# Altium PCB MainPCB.PcbDoc
Units mil, origin at the board's own origin, x right, y up, seen from the top; angles counter-clockwise.
Board outline 2900 x 2000 mil, 4 copper layers (Top GND, Sig/3V3, Sig/5V, Bottom GND), stack 62.445 mil thick; 34 components, 15 nets, 244 pads, 75 vias.
Unrouted connection lines stored in the file: 1.
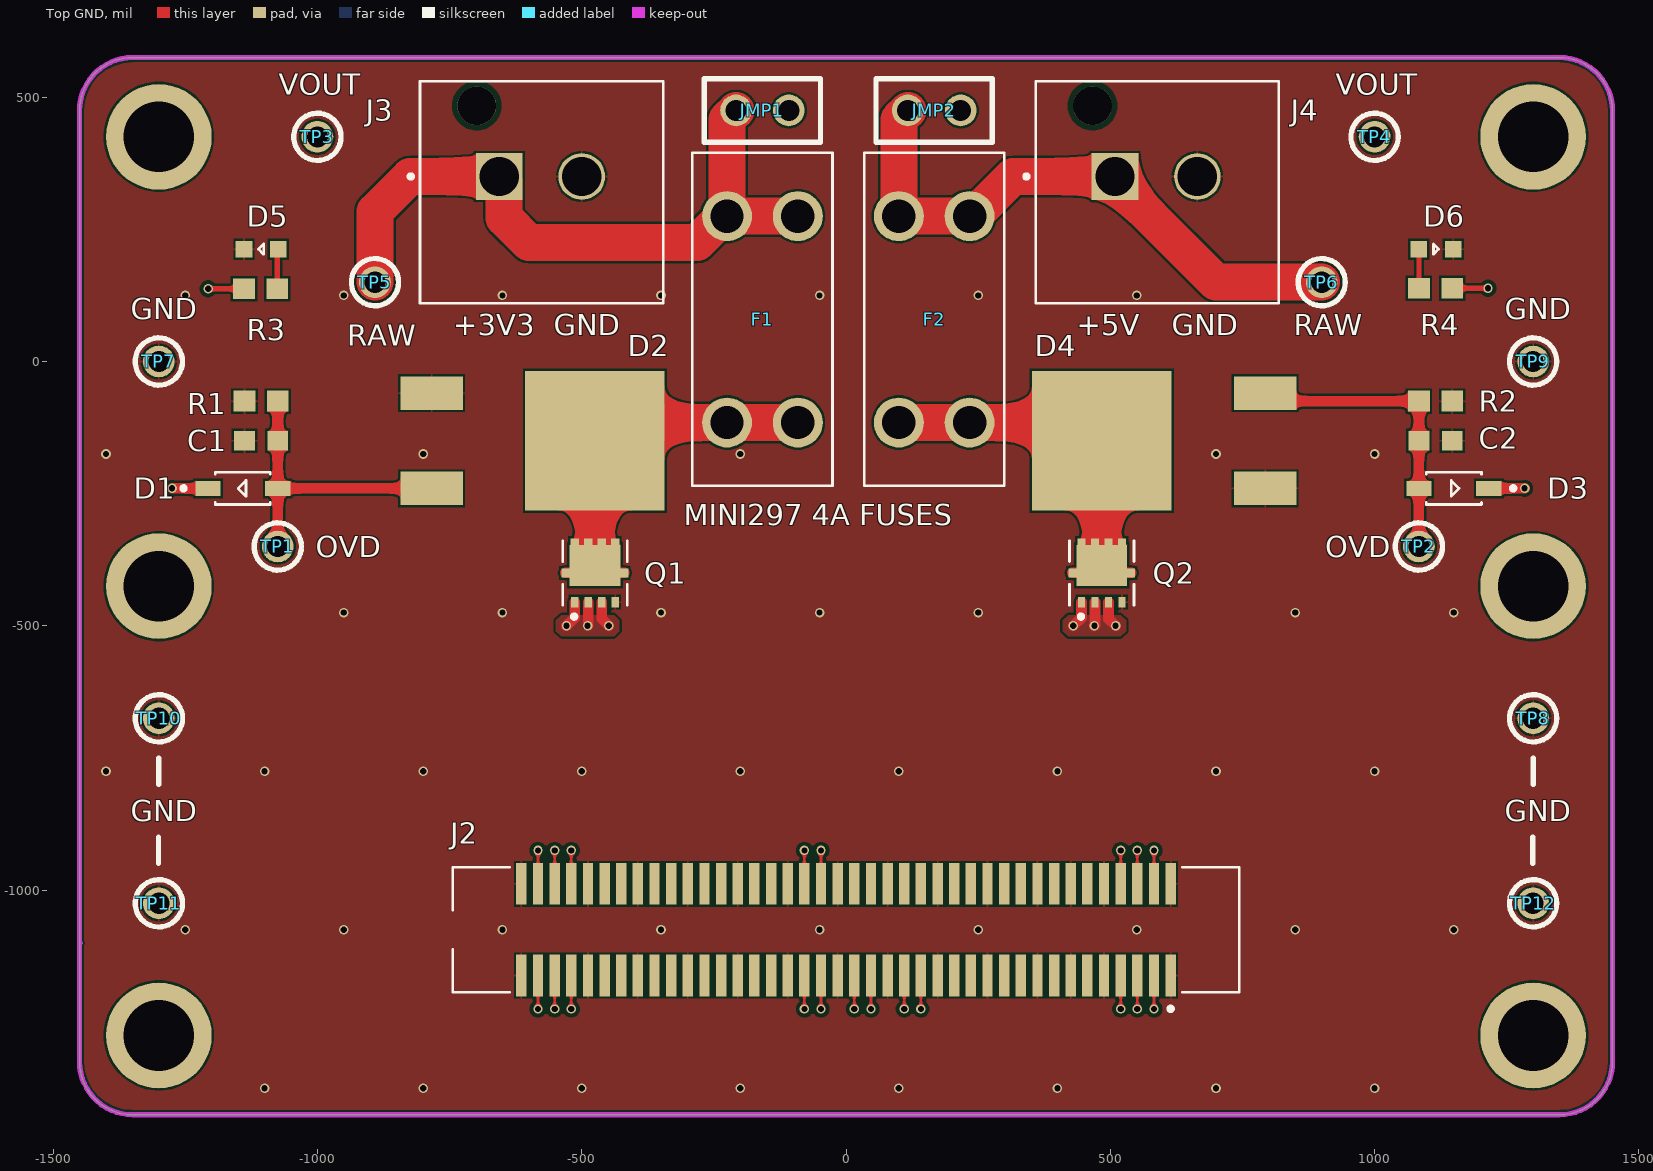
[diagram p0: Top GND view]
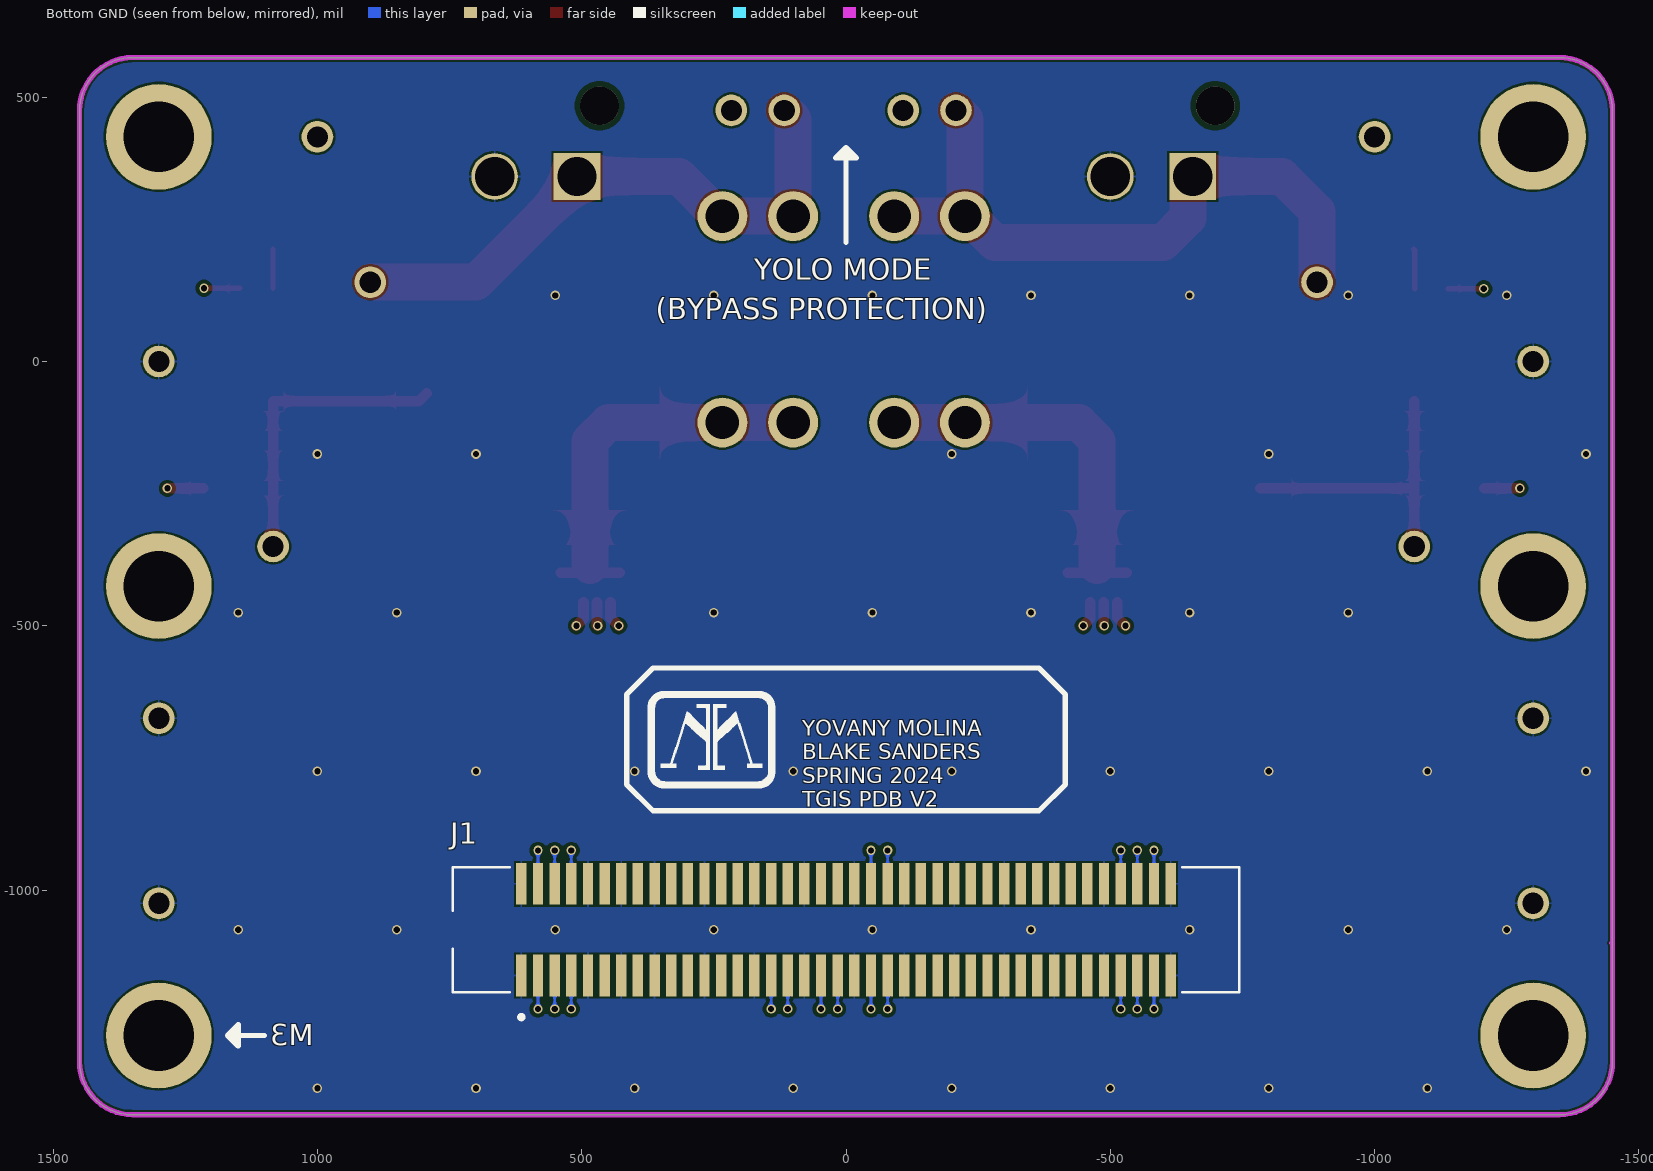
[diagram p1: Bottom GND view, seen from below]
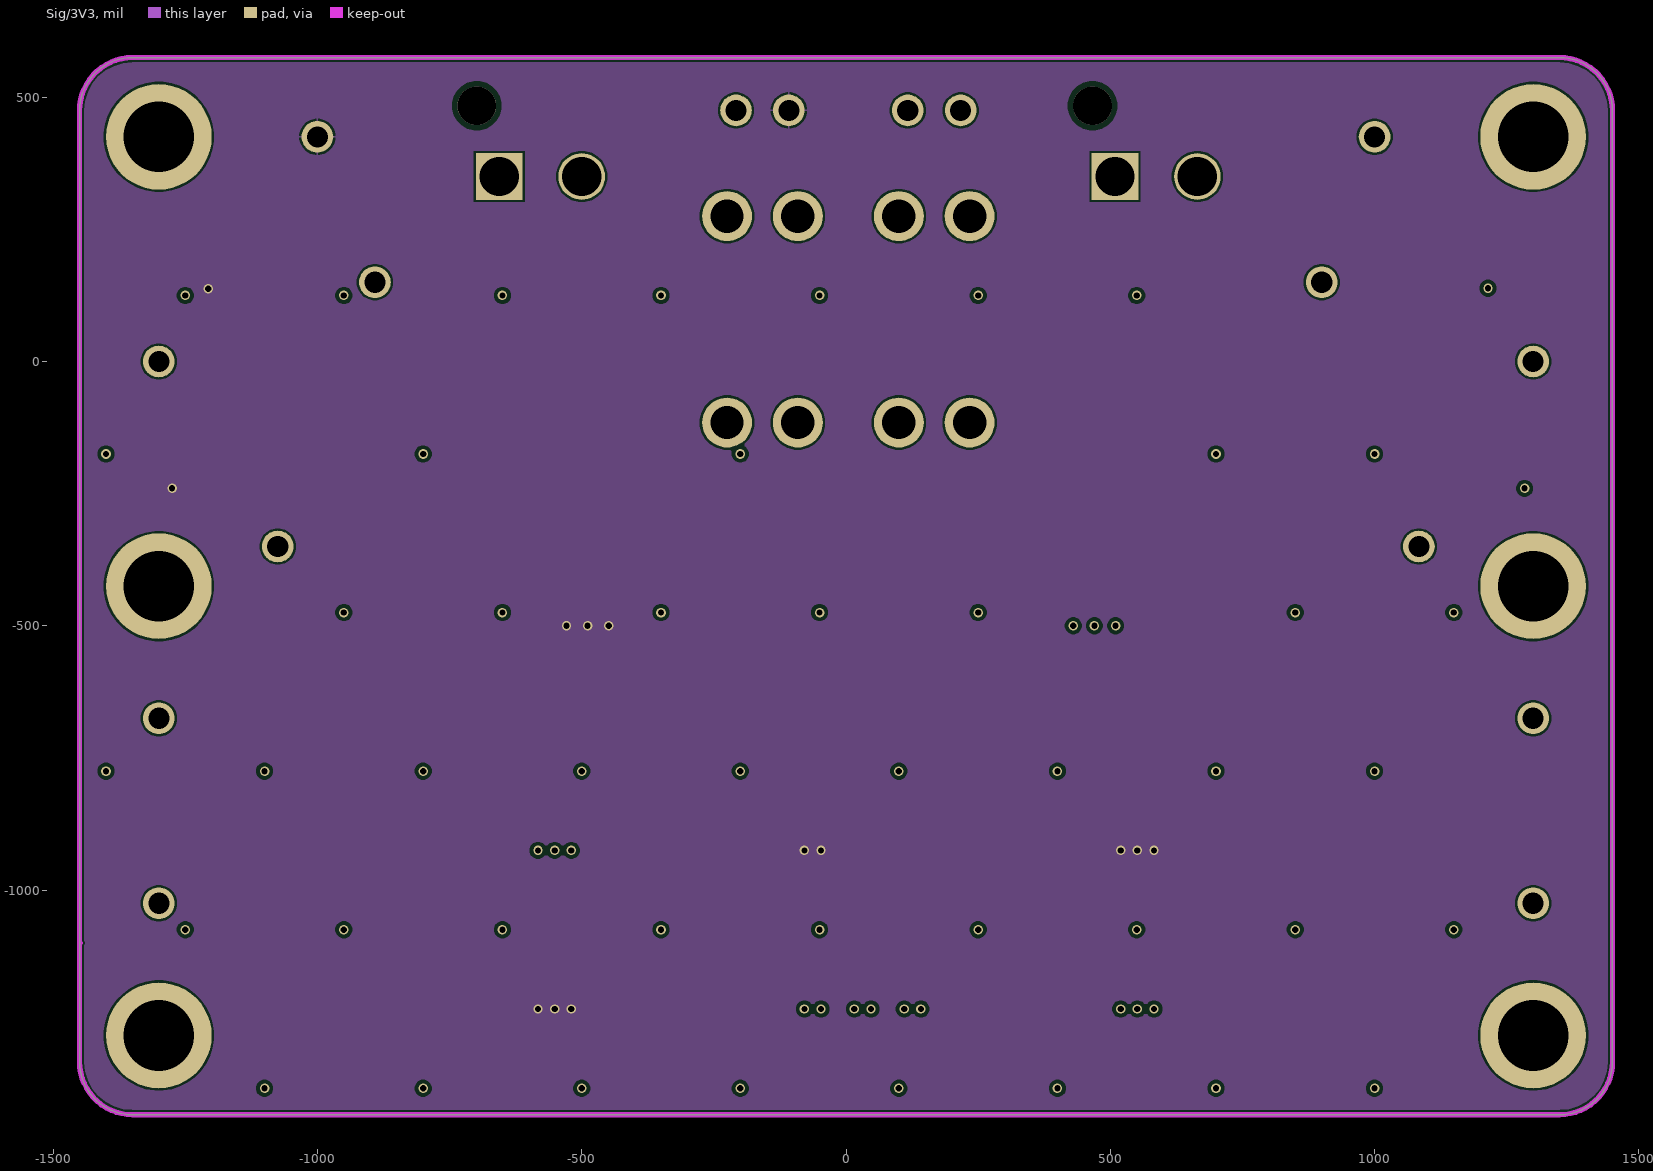
[diagram p2: Sig/3V3]
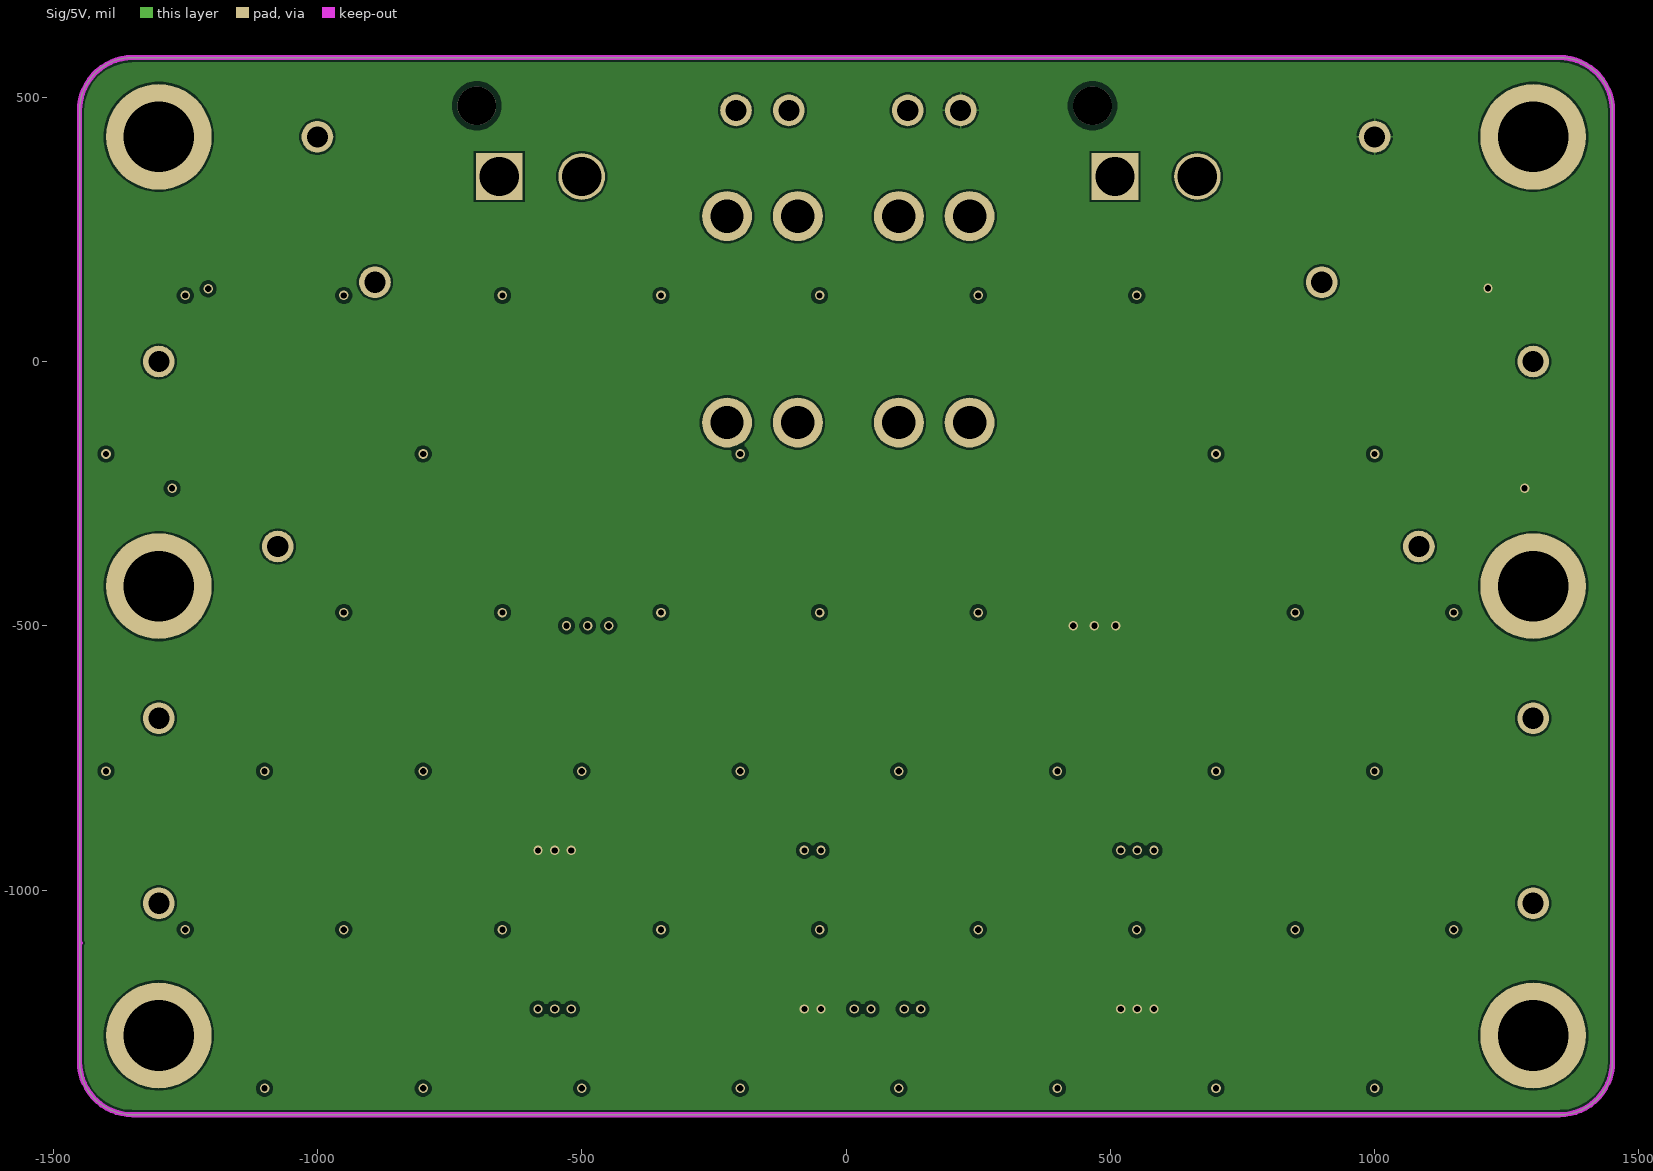
[diagram p3: Sig/5V]
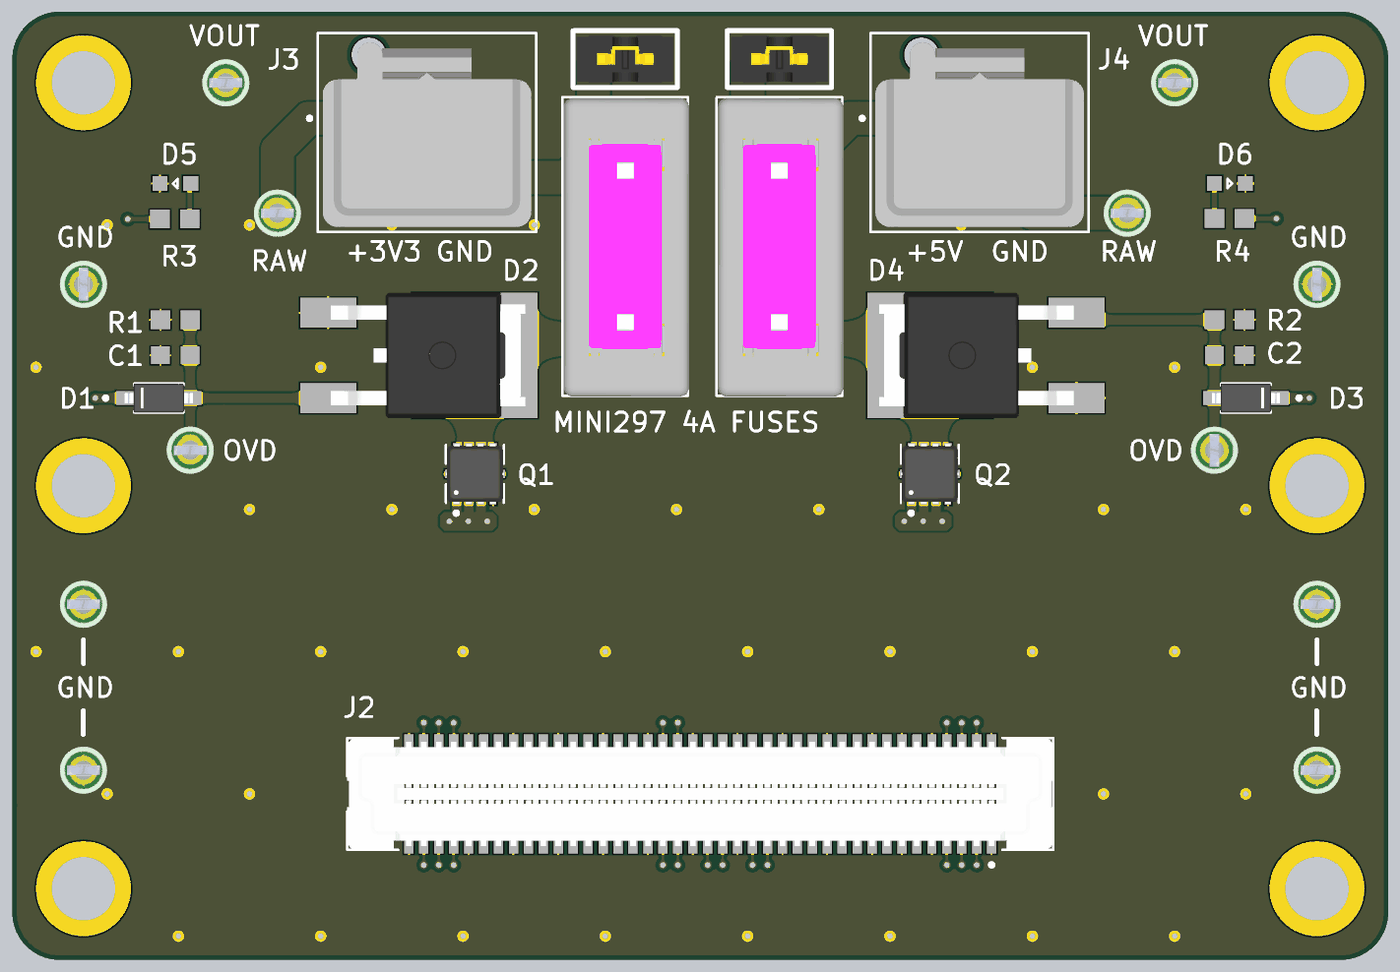
[diagram p4: 3D render of the assembled board from above, using the file's embedded part models]

## Layer stack, top to bottom
Top Mask: solder mask 0.591, Solder Resist, Dk 3.8
Top GND: signal copper 1.378
Dielectric 1: prepreg 8.28, 7628, Dk 4.6
Sig/3V3: signal copper 0.6
Core: core 41.929, FR-4, Dk 4.5
Sig/5V: signal copper 0.6
Dielectric 2: prepreg 8.28, 7628, Dk 4.6
Bottom GND: signal copper 1.378
Bottom Mask: solder mask 0.591, Solder Resist, Dk 3.8

## Board outline
-1450,-1325 -1450,475 cw(c-1350,475) -1350,575 1350,575 cw(c1350,475) 1450,475 1450,-1325 cw(c1350,-1325) 1350,-1425 -1350,-1425 cw(c-1350,-1325)

## Design rules (kind name [scope] priority, off if disabled: settings)
BoardOutlineClearance [All] p1: gap=7.87 ignorepadtopadclearanceinfootprint=FALSE
Clearance [All] p1: gap=4 ignorepadtopadclearanceinfootprint=FALSE except(5: Arc-Via Track-Via SMDPad-Via THPad-Via Via-Via Via-Fill Via-Poly Via-Region Via-Text; 9.84: Arc-Hole Track-Hole SMDPad-Hole THPad-Hole Via-Hole Fill-Hole Poly-Hole Region-Hole Text-Hole)
ComponentClearance [All] p1: gap=4 collisioncheckmode=3 verticalgap=4 showdistances=TRUE
DiffPairsRouting [All] p1: maxlimit=4 minlimit=4 mostfreqgap=4 toplayer_minwidth=4 toplayer_maxwidth=71497.94 toplayer_prefwidth=4 midlayer1_minwidth=4 midlayer1_maxwidth=71497.94 midlayer1_prefwidth=4 midlayer2_minwidth=4 midlayer2_maxwidth=71497.94 midlayer2_prefwidth=4 bottomlayer_minwidth=4 bottomlayer_maxwidth=71497.94 bottomlayer_prefwidth=4 maxuncoupledlength=500
Height [All] p1: minheight=0 maxheight=71497.94 prefheight=500
HoleSize [All] p1: absolutevalues=TRUE maxlimit=248.03 minlimit=7.87 maxpercent=80.000 minpercent=20.000
HoleToHoleClearance [All] p1: gap=9.84 allowstackedmicrovias=FALSE
MinimumAnnularRing [All] p1: minimumring=3
MinimumSolderMaskSliver [All] p1: minsoldermaskwidth=0
PlaneClearance [All] p1: clearance=4
PlaneConnect PlaneConnectPowerPads [InPadClass('PowerPads')] p1: planeconnectstyle=Direct reliefexpansion=20 reliefentries=4 reliefconductorwidth=10 reliefairgap=10
PlaneConnect [All] p2: pad.planeconnectstyle=Relief pad.reliefexpansion=11.81 pad.reliefentries=4 pad.reliefconductorwidth=4 pad.reliefairgap=4 via.planeconnectstyle=Direct via.reliefexpansion=11.81 via.reliefentries=4 via.reliefconductorwidth=5 via.reliefairgap=5
PolygonConnect PolygonConnectPowerPads [All vs (InPadClass('PowerPads'))] p1: connectstyle=Direct reliefconductorwidth=10 reliefentries=4 polygonreliefangle="90 Angle" airgapwidth=10
PolygonConnect [All] p2: thpad.connectstyle=Relief thpad.reliefconductorwidth=4 thpad.reliefentries=4 thpad.polygonreliefangle="90 Angle" thpad.airgapwidth=4 smdpad.connectstyle=Relief smdpad.reliefconductorwidth=4 smdpad.reliefentries=4 smdpad.polygonreliefangle="90 Angle" smdpad.airgapwidth=4 via.connectstyle=Direct via.reliefconductorwidth=5 via.reliefentries=4 via.polygonreliefangle="90 Angle" via.airgapwidth=5
RoutingVias [All] p1: holewidth=7.87 width=17.72 viastyle="Through Hole" minholewidth=7.87 minwidth=17.72 maxholewidth=248.03 maxwidth=257.87
SilkToSilkClearance [All] p1: silktosilkclearance=0
SilkToSolderMaskClearance [IsPad] p1: minsilkscreentomaskgap=4 clearancetoexposedcopper=TRUE
SolderMaskExpansion [All] p1: expansion=2.95 istentingtop=FALSE
Width [All] p1: maxlimit=71497.94 minlimit=4 preferedwidth=4
20 further rules are at their usual default settings.

## Classes and differential pairs
component class Power: C1 C2 D1 D2 D3 D4 D5 D6 F1 F2 J3 J4 JMP1 JMP2 Q1 Q2 R1 R2 R3 R4 TP1 TP2 TP3 TP4 TP5 TP6 TP7 TP8 TP9 TP10 TP11 TP12
component class Connectors: J1 J2

## Components (designator, comment, footprint, x,y, rotation, side; value= is the part's Value field where it differs from the comment)
C1 "100nF" CAPC0603 -1106.5,-150 r180 top
C2 "100nF" CAPC0603 1115.35,-150 r0 top
D1 "3V0" SOD3715X135N -1141.14,-240 r0 top
D2 "TN805" DPAK_TN -475,-150 r180 top
D3 "4V7" SOD3715X135N 1150,-240 r180 top
D4 "TN805" DPAK_TN 483.86,-150 r0 top
D5 "YELLOW" LED0603 -1106.5,212.5 r180 top
D6 "RED" LED0603 1116.34,212.5 r0 top
F1 "Fuse Holder" FUSE_3568 -158.07,79.72 r270 top
F2 "Fuse Holder" FUSE_3568 166.93,79.72 r270 top
J1 "10144517-081802LF" AMPHENOL_10144517-081802LF 0,-1075 r0 bottom
J2 "10144518-081802LF" AMPHENOL_10144518-081802LF 0,-1075 r180 top
J3 "1877285-2" TE_1877285-2 -655.91,350 r0 top
J4 "1877285-2" TE_1877285-2 508.86,350 r0 top
JMP1 "2PINJUMPER" 2PinJumper -208.07,475 r0 top
JMP2 "2PINJUMPER" 2PinJumper 116.93,475 r0 top
Q1 "AONR21321" TRANS_AONR21321 -475,-400 r90 top
Q2 "AONR21321" TRANS_AONR21321 483.86,-400 r90 top
R1 "3.3kR" RES0603 -1106.5,-75 r180 top
R2 "3.3kR" RES0603 1115.35,-75 r0 top
R3 "1kR" RES0603 -1107.48,137.5 r0 top
R4 "1kR" RES0603 1115.35,138.58 r180 top
TP1 "TP" TPTH-100mil -1075,-350 r90 top
TP2 "TP" TPTH-100mil 1083.86,-350 r0 top
TP3 "TP" TPTH-100mil -1000,425 r90 top
TP4 "TP" TPTH-100mil 1000,425 r90 top
TP5 "TP" TPTH-100mil -891.14,150 r90 top
TP6 "TP" TPTH-100mil 900,150 r90 top
TP7 "TP" TPTH-100mil -1300,0 r0 top
TP8 "TP" TPTH-100mil 1300,-675 r90 top
TP9 "TP" TPTH-100mil 1300,0 r0 top
TP10 "TP" TPTH-100mil -1300,-675 r90 top
TP11 "TP" TPTH-100mil -1300,-1025 r270 top
TP12 "TP" TPTH-100mil 1300,-1025 r90 top

## Footprints (in the part's own frame and the unit in brackets; to place one, negate y for a bottom-side part, rotate by r counter-clockwise, add the part's x,y. Pads: shape width x height; smd on the part's side, far side on the other; paste and mask are expansions set on the pad)
2PinJumper [mil]
  round 60 hole 40: 1(0,0) 2(100,0)
  silkscreen extent -60,-60 160,60, body extent -52,-50 152,50, height 339
AMPHENOL_10144517-081802LF [mm]
  rect 0.5x2 smd: 1(15.6,2.2) 2(15.6,-2.2) 3(14.8,2.2) 4(14.8,-2.2) 5(14,2.2) 6(14,-2.2) 7(13.2,2.2) 8(13.2,-2.2) 9(12.4,2.2) 10(12.4,-2.2) 11(11.6,2.2) 12(11.6,-2.2) 13(10.8,2.2) 14(10.8,-2.2) 15(10,2.2) 16(10,-2.2) 17(9.2,2.2) 18(9.2,-2.2) 19(8.4,2.2) 20(8.4,-2.2) 21(7.6,2.2) 22(7.6,-2.2) 23(6.8,2.2) 24(6.8,-2.2) 25(6,2.2) 26(6,-2.2) 27(5.2,2.2) 28(5.2,-2.2) 29(4.4,2.2) 30(4.4,-2.2) 31(3.6,2.2) 32(3.6,-2.2) 33(2.8,2.2) 34(2.8,-2.2) 35(2,2.2) 36(2,-2.2) 37(1.2,2.2) 38(1.2,-2.2) 39(0.4,2.2) 40(0.4,-2.2) 41(-0.4,2.2) 42(-0.4,-2.2) 43(-1.2,2.2) 44(-1.2,-2.2) 45(-2,2.2) 46(-2,-2.2) 47(-2.8,2.2) 48(-2.8,-2.2) 49(-3.6,2.2) 50(-3.6,-2.2) 51(-4.4,2.2) 52(-4.4,-2.2) 53(-5.2,2.2) 54(-5.2,-2.2) 55(-6,2.2) 56(-6,-2.2) 57(-6.8,2.2) 58(-6.8,-2.2) 59(-7.6,2.2) 60(-7.6,-2.2) 61(-8.4,2.2) 62(-8.4,-2.2) 63(-9.2,2.2) 64(-9.2,-2.2) 65(-10,2.2) 66(-10,-2.2) 67(-10.8,2.2) 68(-10.8,-2.2) 69(-11.6,2.2) 70(-11.6,-2.2) 71(-12.4,2.2) 72(-12.4,-2.2) 73(-13.2,2.2) 74(-13.2,-2.2) 75(-14,2.2) 76(-14,-2.2) 77(-14.8,2.2) 78(-14.8,-2.2) 79(-15.6,2.2) 80(-15.6,-2.2)
  silkscreen extent -18.9,-3 18.9,4.3, body extent -18.9,-3 18.9,3, height 3.66
AMPHENOL_10144518-081802LF [mm]
  rect 0.5x2 smd: 1(-15.6,2.2) 2(-15.6,-2.2) 3(-14.8,2.2) 4(-14.8,-2.2) 5(-14,2.2) 6(-14,-2.2) 7(-13.2,2.2) 8(-13.2,-2.2) 9(-12.4,2.2) 10(-12.4,-2.2) 11(-11.6,2.2) 12(-11.6,-2.2) 13(-10.8,2.2) 14(-10.8,-2.2) 15(-10,2.2) 16(-10,-2.2) 17(-9.2,2.2) 18(-9.2,-2.2) 19(-8.4,2.2) 20(-8.4,-2.2) 21(-7.6,2.2) 22(-7.6,-2.2) 23(-6.8,2.2) 24(-6.8,-2.2) 25(-6,2.2) 26(-6,-2.2) 27(-5.2,2.2) 28(-5.2,-2.2) 29(-4.4,2.2) 30(-4.4,-2.2) 31(-3.6,2.2) 32(-3.6,-2.2) 33(-2.8,2.2) 34(-2.8,-2.2) 35(-2,2.2) 36(-2,-2.2) 37(-1.2,2.2) 38(-1.2,-2.2) 39(-0.4,2.2) 40(-0.4,-2.2) 41(0.4,2.2) 42(0.4,-2.2) 43(1.2,2.2) 44(1.2,-2.2) 45(2,2.2) 46(2,-2.2) 47(2.8,2.2) 48(2.8,-2.2) 49(3.6,2.2) 50(3.6,-2.2) 51(4.4,2.2) 52(4.4,-2.2) 53(5.2,2.2) 54(5.2,-2.2) 55(6,2.2) 56(6,-2.2) 57(6.8,2.2) 58(6.8,-2.2) 59(7.6,2.2) 60(7.6,-2.2) 61(8.4,2.2) 62(8.4,-2.2) 63(9.2,2.2) 64(9.2,-2.2) 65(10,2.2) 66(10,-2.2) 67(10.8,2.2) 68(10.8,-2.2) 69(11.6,2.2) 70(11.6,-2.2) 71(12.4,2.2) 72(12.4,-2.2) 73(13.2,2.2) 74(13.2,-2.2) 75(14,2.2) 76(14,-2.2) 77(14.8,2.2) 78(14.8,-2.2) 79(15.6,2.2) 80(15.6,-2.2)
  silkscreen extent -18.9,-3 18.9,3.9, body extent -18.9,-3 18.9,3, height 4.71
CAPC0603 [mm] "Chip Capacitor, 2-Leads, Body 1.60x0.80mm, IPC Medium Density"
  rect 1x0.95 smd: 1(-0.8,0) 2(0.8,0)
  body extent -0.88,-0.48 0.87,0.48, height 0.8
DPAK_TN [mm]
  rect 6.7x6.7 smd: A(0,0)
  rect 3x1.6 smd: G(7.85,2.286) K(7.85,-2.286)
  body extent -2.71,-3.36 7.71,3.36, height 2.39
FUSE_3568 [mm]
  round 2.4 hole 1.6: 1(-4.96,1.7) 2(4.96,1.7) 3(-4.96,-1.7) 4(4.96,-1.7)
  silkscreen extent -8,-3.36 8,3.36, body extent -7.96,-3.3 8.04,3.43, height 16.21
LED0603 [mm] "Chip LED, 2-Leads, Body 1.60x0.80mm, IPC Medium Density"
  rect 0.8x0.8 smd: A(-0.825,0) C(0.825,0)
  silkscreen extent -0.12,-0.25 0.13,0.25, body extent -0.87,-0.48 0.88,0.47, height 0.8
RES0603 [mm] "Chip Resistor, 2-Leads, Body 1.60x0.80mm, IPC Medium Density"
  rect 1.05x1 smd: 1(-0.8,0) 2(0.8,0)
  body extent -0.88,-0.48 0.87,0.47, height 0.8
SOD3715X135N [mm]
  rect 1.21x0.73 smd: A(1.68,0) K(-1.68,0)
  silkscreen extent -2.95,-0.77 1.33,0.77, body extent -1.83,-0.77 1.83,0.77, height 1.36
TE_1877285-2 [mm]
  rect 2.24x2.24 hole 1.89: 1(0,0)
  round 2.24 hole 1.89: 2(3.96,0)
  round 1.86 hole 1.86 unplated: ""(-1.08,3.4)
  silkscreen extent -4.35,-6.1 7.87,4.57, body extent -3.55,-5.82 7.62,4.06, height 12.01
TPTH-100mil [mil] "Test Point"
  round 60 hole 40: 1(0,0)
  silkscreen extent -45,-45 45,45, body extent -50,-50 50,50, height 182
TRANS_AONR21321 [mm]
  rect 0.5x0.35 smd: 1(-1.4,0.975) 2(-1.4,0.325) 3(-1.4,-0.325) 4(-1.4,-0.975)
  rect 0.3x0.4 smd: 5(1.5,-0.975) 6(1.5,-0.325) 7(1.5,0.325) 8(1.5,0.975)
  rect 1.98x2.45 smd paste-2: 9(0.36,0)
  rect 0.43x0.38 smd: 9_1(0,1.415) 9_2(0,-1.415)
  silkscreen extent -2.2,-1.55 1.55,1.55, body extent -1.6,-1.55 1.6,1.55, height 0.9

## Part data
C1 C2: library part CC0603KRX7R7BB104, "Ceramic Capacitor, Multilayer, Cera", Capacitor Type=Ceramic, Case/Package=0603, Manufacturer=Yageo, Max Operating Temperature=125°C, Min Operating Temperature=-55°C, Package Shape=Rectangular, Package Style=SMTMeter, Rated DC Voltage (URdc)=16V, Supplier Part Number 1=311-1088-1-ND, Temperature Characteristics Code=X7R, Tolerance  (fill in as +-)=10%, Category="Ceramic Capacitors", ComponentLink1Description=https://datasheet.ciiva.com:443/pdf, ComponentLink1URL=https://datasheet.ciiva.com:443/pdf, ComponentLink2Description=https://datasheet.ciiva.com/11786/0, ComponentLink2URL=https://datasheet.ciiva.com/11786/0, ComponentLink3Description=https://datasheet.ciiva.com/8033/70, ComponentLink3URL=https://datasheet.ciiva.com/8033/70, ComponentLink4Description=https://datasheet.ciiva.com/7978/14, ComponentLink4URL=https://datasheet.ciiva.com/7978/14, ComponentLink5Description=https://datasheet.ciiva.com/28450/1, ComponentLink5URL=https://datasheet.ciiva.com/28450/1, ComponentLink6Description=https://datasheet.ciiva.com/46430/1, ComponentLink6URL=https://datasheet.ciiva.com/46430/1, ComponentLink7Description=https://datasheet.ciiva.com/144/mlc, ComponentLink7URL=https://datasheet.ciiva.com/144/mlc, ComponentLink8Description=https://datasheet.ciiva.com/144/mlc, ComponentLink8URL=https://datasheet.ciiva.com/144/mlc, ComponentLink9Description=https://datasheet.ciiva.com/144/mlc, ComponentLink9URL=https://datasheet.ciiva.com/144/mlc, ComponentLink10Description=https://datasheet.ciiva.com/8033/17, ComponentLink10URL=https://datasheet.ciiva.com/8033/17, ComponentLink11Description=https://datasheet.ciiva.com/13395/u, ComponentLink11URL=https://datasheet.ciiva.com/13395/u, ComponentLink12Description=https://datasheet.ciiva.com/11464/u, ComponentLink12URL=https://datasheet.ciiva.com/11464/u, ComponentLink13Description=https://datasheet.ciiva.com/15165/g, ComponentLink13URL=https://datasheet.ciiva.com/15165/g, ComponentLink14Description=https://datasheet.ciiva.com:443/pdfs/VipMasterIC/IC/YAGO/YAGO-S-A0003557223, ComponentLink14URL=https://datasheet.ciiva.com:443/pdfs/VipMasterIC/IC/YAGO/YAGO-S-A0003557223, ComponentLink15Description=https://datasheet.ciiva.com/11786/0900766b80d84f1d-11786077.pdf?src-supplie, ComponentLink15URL=https://datasheet.ciiva.com/11786/0900766b80d84f1d-11786077.pdf?src-supplie, ComponentLink16Description=https://datasheet.ciiva.com/8033/70765-8033799.pdf?src-supplier=Element14, ComponentLink16URL=https://datasheet.ciiva.com/8033/70765-8033799.pdf?src-supplier=Element14, ComponentLink17Description=https://datasheet.ciiva.com/7978/1489800-7978141.pdf?src-supplier=Element14, ComponentLink17URL=https://datasheet.ciiva.com/7978/1489800-7978141.pdf?src-supplier=Element14, ComponentLink18URL=https://datasheet.ciiva.com/28450/1489800-28450552.pdf?src-supplier=Element, Dielectric Material=Ceramic, Height=0.8mm, JESD-609 Code=e3, Length=1.6mm, Manufacturer Part Number=CC0603KRX7R7BB104, Mounting Technology="Surface Mount", Multilayer=Yes, Packaging="Tape and Reel", Part Number=CC0603KRX7R7BB104, Pins=2, Pricing 1="1=0.1, 10=0.042, 50=0.0238, 100=0.0", Reach SVHC Compliant=Yes, RoHS=Yes, RoHS Compliant=Yes, Stock 1=11347706, Supplier 1=Digikey, Terminal Finish=Nickel, Termination=Wraparound, Tolerance (fill in as +-)=10%, Width=0.8mm
D1: library part BZT52C3V0, "DIODE ZENER 3.0V 500MW SOD123", Package="SOD-323F-2 Taiwan Semiconductor", Supplier Part Number 1=BZT52C3V0-FDICT-ND, Availability="In Stock", Check_prices=https://www.snapeda.com/parts/BZT52C4V7S%20R9/Taiwan+Semiconductor/view-part/?ref=eda, MF="Taiwan Semiconductor", MP="BZT52C4V7S R9", Price=None, SnapEDA_Link=https://www.snapeda.com/parts/BZT52C4V7S%20R9/Taiwan+Semiconductor/view-part/?ref=snap, Supplier 1=Digikey
D2 D4: library part TN805-600B-TR, "SCR 600 V 8 A Standard Recovery Surface Mount DPAK", Package="SOD-323F-2 Taiwan Semiconductor", Supplier Part Number 1=497-6769-1-ND, Availability="In Stock", Check_prices=https://www.snapeda.com/parts/BZT52C4V7S%20R9/Taiwan+Semiconductor/view-part/?ref=eda, MF="Taiwan Semiconductor", MP="BZT52C4V7S R9", Price=None, SnapEDA_Link=https://www.snapeda.com/parts/BZT52C4V7S%20R9/Taiwan+Semiconductor/view-part/?ref=snap, Supplier 1=Digikey
D3: library part BZT52C4V7, "DIODE ZENER 4.7V 500MW SOD123", Package="SOD-323F-2 Taiwan Semiconductor", Supplier Part Number 1=BZT52C4V7-13-FDICT-ND, Availability="In Stock", Check_prices=https://www.snapeda.com/parts/BZT52C4V7S%20R9/Taiwan+Semiconductor/view-part/?ref=eda, MF="Taiwan Semiconductor", MP="BZT52C4V7S R9", Price=None, SnapEDA_Link=https://www.snapeda.com/parts/BZT52C4V7S%20R9/Taiwan+Semiconductor/view-part/?ref=snap, Supplier 1=Digikey
D5: library part 150060YS75000, "Single Color LED, Yellow, Water Cle", Color=Yellow, Forward Current=30mA, Manufacturer="Wurth Electronics", Max Operating Temperature=85°C, Min Operating Temperature=-40°C, Supplier Part Number 1=732-4981-1-ND, Category=LEDs, Channels=1, ComponentLink1Description=https://datasheet.ciiva.com:443/pdf, ComponentLink1URL=https://datasheet.ciiva.com:443/pdf, ComponentLink2Description=https://datasheet.ciiva.com/23843/1, ComponentLink2URL=https://datasheet.ciiva.com/23843/1, ComponentLink3Description=https://datasheet.ciiva.com/29279/7, ComponentLink3URL=https://datasheet.ciiva.com/29279/7, ComponentLink4Description=https://datasheet.ciiva.com/22656/1, ComponentLink4URL=https://datasheet.ciiva.com/22656/1, ComponentLink5Description=https://datasheet.ciiva.com/29563/1, ComponentLink5URL=https://datasheet.ciiva.com/29563/1, ComponentLink6Description=https://datasheet.ciiva.com/29563/1, ComponentLink6URL=https://datasheet.ciiva.com/29563/1, ComponentLink7Description=https://datasheet.ciiva.com/48430/1, ComponentLink7URL=https://datasheet.ciiva.com/48430/1, Lens Style="WATER CLEAR", Luminous Intensity-Nom=120mcd, Manufacturer Part Number=150060YS75000, Mounting Technology="Surface Mount", Optoelectronic Device Type="SINGLE COLOR LED", Overall Height=0.7mm, Packaging="Tape and Reel", Part Number=150060YS75000, Pins=2, Pricing 1="1=0.15, 50=0.142, 100=0.122, 500=0.", Reach SVHC Compliant=Yes, RoHS=Yes, RoHS Compliant=Yes, Shape=Rectangular, Size=1.1mm, Stock 1=50357, Supplier 1=Digikey, Terminal Pitch=1.6mm, Viewing Angle=140°
D6: library part 150060RS75000, "Single Color LED, Red, Water Clear,", Color=Red, Forward Current=30mA, Manufacturer="Wurth Electronics", Max Operating Temperature=85°C, Min Operating Temperature=-40°C, Supplier Part Number 1=732-4978-1-ND, Category=LEDs, Channels=1, ComponentLink1Description=https://datasheet.ciiva.com:443/pdf, ComponentLink1URL=https://datasheet.ciiva.com:443/pdf, ComponentLink2Description=https://datasheet.ciiva.com/29563/1, ComponentLink2URL=https://datasheet.ciiva.com/29563/1, ComponentLink3Description=https://datasheet.ciiva.com/29279/7, ComponentLink3URL=https://datasheet.ciiva.com/29279/7, Lens Style="WATER CLEAR", Luminous Intensity-Nom=250mcd, Manufacturer Part Number=150060RS75000, Mounting Technology="Surface Mount", Optoelectronic Device Type="SINGLE COLOR LED", Overall Height=0.7mm, Packaging="Tape and Reel", Part Number=150060RS75000, Pins=2, Pricing 1="1=0.15, 50=0.142, 100=0.122, 500=0.", Reach SVHC Compliant=Yes, RoHS=Yes, RoHS Compliant=Yes, Shape=Rectangular, Size=1.1mm, Stock 1=139850, Supplier 1=Digikey, Terminal Pitch=1.6mm, Viewing Angle=140°
F1 F2: library part 3568, "Fuse Holder 30 A 500V 1 Circuit Blade Through Hole", Package=None, Supplier Part Number 1=4264032, Availability=Unavailable, MP=3568, Price=None, Supplier 1="Future Electronics"
J1: "CONN RCPT 1 80POS SMD GOLD", Supplier Part Number 1=609-5437-1-ND, Supplier 1=Digikey, System=Connector
J2: "CONN PLUG 1 80POS SMD GOLD", Supplier Part Number 1=609-5453-1-ND, Supplier 1=Digikey, System=Connector
J3 J4: Supplier Part Number 1=A99845-ND, Supplier 1=Digi-Key
JMP1 JMP2: "2 Position Jumper"
Q1 Q2: "P-Channel 30 V 24A (Tc) 4.1W (Ta), 24W (Tc) Surface Mount 8-DFN-EP (3x3)", Package="PowerVDFN-8 Alpha &amp; Omega Semiconductor Inc.", Supplier Part Number 1=785-1797-1-ND, Check_prices=https://www.snapeda.com/parts/AONR21321/Alpha+%2526+Omega+Semiconductor+Inc./view-part/?ref=eda, MF="Alpha &", MP=AONR21321, SnapEDA_Link=https://www.snapeda.com/parts/AONR21321/Alpha+%2526+Omega+Semiconductor+Inc./view-part/?ref=snap, Supplier 1=Digikey
R1 R2: library part RC0603FR-073K3L, "Fixed Resistor, Metal Glaze/thick F", Case/Package=0603, Manufacturer=Yageo, Max Operating Temperature=155°C, Min Operating Temperature=-55°C, Package Height=0.45mm, Package Length=1.6mm, Package Shape=Rectangular, Package Style=SMTMeter, Package Width=0.8mm, Power=100mW, Rated Temperature=70°C, Resistor Type="FIXED RESISTOR", Supplier Part Number 1=311-3.30KHRCT-ND, Temperature Coefficient=100ppm/°C, Tolerance=1%, Working Voltage=75V, Additional Feature="LASER TRIMMABLE", Category="Chip SMD Resistors", ComponentLink1Description=https://datasheet.ciiva.com:443/pdf, ComponentLink1URL=https://datasheet.ciiva.com:443/pdf, ComponentLink2Description=https://datasheet.ciiva.com/7746/16, ComponentLink2URL=https://datasheet.ciiva.com/7746/16, ComponentLink3Description=https://datasheet.ciiva.com/46440/1, ComponentLink3URL=https://datasheet.ciiva.com/46440/1, ComponentLink4Description=https://datasheet.ciiva.com/2453/py, ComponentLink4URL=https://datasheet.ciiva.com/2453/py, ComponentLink5Description=https://datasheet.ciiva.com/2453/py, ComponentLink5URL=https://datasheet.ciiva.com/2453/py, ComponentLink6Description=https://datasheet.ciiva.com/7746/44, ComponentLink6URL=https://datasheet.ciiva.com/7746/44, ComponentLink7Description=https://datasheet.ciiva.com/7746/44, ComponentLink7URL=https://datasheet.ciiva.com/7746/44, Construction=Chip, JESD-609 Code=e3, Manufacturer Part Number=RC0603FR-073K3L, Mounting Technology="Surface Mount", Packaging="Tape and Reel", Part Number=RC0603FR-073K3L, Pins=2, Pricing 1="1=0.1, 10=0.019, 50=0.0112, 100=0.0", Reach SVHC Compliant=Yes, RoHS=Yes, RoHS Compliant=Yes, Stock 1=932325, Supplier 1=Digikey, Technology="METAL GLAZE/THICK FILM", Terminal Finish=Nickel, Termination=Wraparound
R3 R4: library part RC0603FR-071KL, "Fixed Resistor, Metal Glaze/thick F", Case/Package=0603, Manufacturer=Yageo, Max Operating Temperature=155°C, Min Operating Temperature=-55°C, Package Height=0.45mm, Package Length=1.6mm, Package Shape=Rectangular, Package Style=SMTMeter, Package Width=0.8mm, Power=100mW, Rated Temperature=70°C, Resistor Type="FIXED RESISTOR", Supplier Part Number 1=4016291, Temperature Coefficient=100ppm/°C, Tolerance=1%, Working Voltage=75V, Additional Feature="LASER TRIMMABLE", Category="Chip SMD Resistors", ComponentLink1Description=https://datasheet.ciiva.com:443/pdf, ComponentLink1URL=https://datasheet.ciiva.com:443/pdf, ComponentLink2Description=https://datasheet.ciiva.com/11808/0, ComponentLink2URL=https://datasheet.ciiva.com/11808/0, ComponentLink3Description=https://datasheet.ciiva.com/7746/16, ComponentLink3URL=https://datasheet.ciiva.com/7746/16, ComponentLink4Description=https://datasheet.ciiva.com/7660/18, ComponentLink4URL=https://datasheet.ciiva.com/7660/18, ComponentLink5Description=https://datasheet.ciiva.com/7983/44, ComponentLink5URL=https://datasheet.ciiva.com/7983/44, ComponentLink6Description=https://datasheet.ciiva.com/7746/17, ComponentLink6URL=https://datasheet.ciiva.com/7746/17, ComponentLink7Description=https://datasheet.ciiva.com/7746/17, ComponentLink7URL=https://datasheet.ciiva.com/7746/17, ComponentLink8Description=https://datasheet.ciiva.com/8896/py, ComponentLink8URL=https://datasheet.ciiva.com/8896/py, ComponentLink9Description=https://datasheet.ciiva.com/15189/g, ComponentLink9URL=https://datasheet.ciiva.com/15189/g, Construction=Chip, JESD-609 Code=e3, Manufacturer Part Number=RC0603FR-071KL, Mounting Technology="Surface Mount", Packaging="Tape and Reel", Part Number=RC0603FR-071KL, Pins=2, Pricing 1="5000=0.0015, 50000=0.0014, 150000=0", Reach SVHC Compliant=Yes, RoHS=Yes, RoHS Compliant=Yes, Stock 1=11540000, Technology="METAL GLAZE/THICK FILM", Terminal Finish=Nickel, Termination=Wraparound

## Free pads (board coordinates)
  round 200 hole 133.86 unplated: M3(-1300,-1275) M3(-1300,-425) M3(-1300,425) M3(1300,-1275) M3(1300,-425) M3(1300,425)

## Via types
v1: diameter 18, hole 12, Top GND to Bottom GND, 45 vias
v2: diameter 17.81, hole 11.81, Top GND to Bottom GND, tented top, 30 vias

## Nets (pads, with @x,y where several pads share a name; then routed paths per layer and width w, separated by ;. In a path a pad name is that pad's centre, name@x,y a point inside that pad or via, vN(x,y) a via of type N, cw(c..) or ccw(c..) an arc to the next point about the centre after c; other vN are vias at no path point)
+3V3: D1.K J1.4 J1.6 J1.8 J1.44 J1.46 J1.73 J1.75 J1.77 J2.4 J2.6 J2.8 J2.44 J2.46 J2.73 J2.75 J2.77 JMP1.2 Q1.1 Q1.2 Q1.3 R3.1 TP3.1 | length 1295.1
  Top GND w5: v2(-582.68,-1225) J2.77 ; v2(-551.18,-1225) J2.75 ; v2(-519.68,-1225) J2.73 ; J2.46 v2(-78.74,-925) ; J2.44 v2(-47.25,-925) ; J2.8 v2(519.68,-925) ; J2.6 v2(551.18,-925) ; J2.4 v2(582.68,-925)
  Top GND w10: v2(-1206.69,137.5) R3.1
  Top GND w20: v2(-1275,-240) D1.K ; v2(-528.86,-500) -513.39,-484.53 Q1.1 ; v2@-487.8,-498.94 Q1.2 ; Q1.3 -462.2,-486.65 v2(-448.86,-500)
  Bottom GND w5: v2(-582.68,-1225) J1.77 ; v2(-551.18,-1225) J1.75 ; v2(-519.68,-1225) J1.73 ; J1.46 v2(-78.74,-925) ; J1.44 v2(-47.25,-925) ; J1.8 v2(519.68,-925) ; J1.6 v2(551.18,-925) ; J1.4 v2(582.68,-925)
  other v2: -488.86,-500
+3V3_OVDETECT: C1.1 D1.A D2.G R1.1 TP1.1 | length 565.9
  Top GND w20: TP1.1 D1.A ; R1.1 C1.1 D1.A ; D2.G D1.A
+3V3_OVP: D2.A F1.2 F1.4 Q1.5 Q1.6 Q1.7 Q1.8 Q1.9 Q1.9_1 Q1.9_2 | length 757.1
  Top GND w20: Q1.9_1 -489.17,-400 Q1.9 -460.83,-400 Q1.9_2
  Top GND w70: Q1.9 D2.A -440.55,-115.55 F1.4 F1.2
+3V3_RAW: F1.1 F1.3 J3.1 JMP1.1 TP5.1 | length 1281.2
  Top GND w70: TP5.1 -891.14,283.86 -825,350 J3.1 -646.81,340.91 -646.81,271.81 -600,225 -281.63,225 -231.63,275 F1.3 ; JMP1.1 -225,458.07 F1.3 ; F1.1 F1.3
+5V: D3.K J1.3 J1.5 J1.7 J1.43 J1.45 J1.74 J1.76 J1.78 J2.3 J2.5 J2.7 J2.43 J2.45 J2.74 J2.76 J2.78 JMP2.2 Q2.1 Q2.2 Q2.3 R4.1 TP4.1 | length 1296.6
  Top GND w5: J2.78 v2(-582.68,-925) ; J2.76 v2(-551.18,-925) ; J2.74 v2(-519.69,-925) ; v2(-78.74,-1225) J2.45 ; v2(-47.24,-1225) J2.43 ; v2(519.69,-1225) J2.7 ; v2(551.18,-1225) J2.5 ; v2(582.68,-1225) J2.3
  Top GND w10: R4.1 v2(1214.57,138.58)
  Top GND w20: v2(430,-500) 445.47,-484.53 Q2.1 ; v2(470,-500) 471.06,-498.94 Q2.2 ; Q2.3 496.65,-486.65 v2(510,-500) ; D3.K v2(1283.86,-240)
  Bottom GND w5: J1.78 v2(-582.68,-925) ; J1.76 v2(-551.18,-925) ; J1.74 v2(-519.69,-925) ; v2(-78.74,-1225) J1.45 ; v2(-47.24,-1225) J1.43 ; v2(519.69,-1225) J1.7 ; v2(551.18,-1225) J1.5 ; v2(582.68,-1225) J1.3
+5V_OVDETECT: C2.1 D3.A D4.G R2.1 TP2.1 | length 572.2
  Top GND w20: D4.G 807.91,-75 R2.1 C2.1 D3.A TP2.1
+5V_OVP: D4.A F2.2 F2.4 Q2.5 Q2.6 Q2.7 Q2.8 Q2.9 Q2.9_1 Q2.9_2 | length 717
  Top GND w20: Q2.9_1 Q2.9@469.68,-400 ; Q2.9@498.03,-400 Q2.9_2
  Top GND w70: F2.4 F2.2 449.41,-115.55 D4.A Q2.9
+5V_RAW: F2.1 F2.3 J4.1 JMP2.1 TP6.1 | length 1126.1
  Top GND w70: JMP2.1 100,458.07 F2.3 F2.1 240.48,275 315.48,350 J4.1 517.95,340.91 517.95,332.05 700,150 TP6.1
CAN0_N: J1.39 J2.39 | length 126.8
  Top GND w5: v2(15.75,-1225) J2.39
  Bottom GND w5: v2(15.75,-1225) J1.39
CAN0_P: J1.37 J2.37 | length 126.8
  Top GND w5: v2(47.25,-1225) J2.37
  Bottom GND w5: v2(47.25,-1225) J1.37
GND: C1.2 C2.2 D2.K D4.K D5.C D6.C J1.1 J1.2 J1.9 J1.10 J1.13 J1.14 J1.17 J1.18 J1.23 J1.24 J1.29 J1.30 J1.35 J1.36 J1.41 J1.42 J1.47 J1.48 J1.53 J1.54 J1.59 J1.60 J1.65 J1.66 J1.71 J1.72 J1.79 J1.80 J2.1 J2.2 J2.9 J2.10 J2.13 J2.14 J2.17 J2.18 J2.23 J2.24 J2.29 J2.30 J2.35 J2.36 J2.41 J2.42 J2.47 J2.48 J2.53 J2.54 J2.59 J2.60 J2.65 J2.66 J2.71 J2.72 J2.79 J2.80 J3.2 J4.2 Q1.4 Q2.4 R1.2 R2.2 TP7.1 TP8.1 TP9.1 TP10.1 TP11.1 TP12.1
  other v1: -1100,-1375 -800,-1375 -500,-1375 -200,-1375 100,-1375 400,-1375 700,-1375 1000,-1375 -1250,-1075 -950,-1075 -650,-1075 -350,-1075 -50,-1075 250,-1075 550,-1075 850,-1075 1150,-1075 -1400,-775 -1100,-775 -800,-775 -500,-775 -200,-775 100,-775 400,-775 700,-775 1000,-775 -950,-475 -650,-475 -350,-475 -50,-475 250,-475 850,-475 1150,-475 -1400,-175 -800,-175 -200,-175 700,-175 1000,-175 -1250,125 -950,125 -650,125 -350,125 -50,125 250,125 550,125
I2C0_SCL: J1.33 J2.33 | length 126.8
  Top GND w5: v2(110.24,-1225) J2.33
  Bottom GND w5: v2(110.24,-1225) J1.33
I2C0_SDA: J1.31 J2.31 | length 126.8
  Top GND w5: v2(141.73,-1225) J2.31
  Bottom GND w5: v2(141.73,-1225) J1.31
NetD5_A: D5.A R3.2 | length 75.8
  Top GND w10: R3.2 -1075.98,210.53 D5.A
NetD6_A: D6.A R4.2 | length 73.9
  Top GND w10: R4.2 D6.A
pads on no net: J1.11 J1.12 J1.15 J1.16 J1.19 J1.20 J1.21 J1.22 J1.25 J1.26 J1.27 J1.28 J1.32 J1.34 J1.38 J1.40 J1.49 J1.50 J1.51 J1.52 J1.55 J1.56 J1.57 J1.58 J1.61 J1.62 J1.63 J1.64 J1.67 J1.68 J1.69 J1.70 J2.11 J2.12 J2.15 J2.16 J2.19 J2.20 J2.21 J2.22 J2.25 J2.26 J2.27 J2.28 J2.32 J2.34 J2.38 J2.40 J2.49 J2.50 J2.51 J2.52 J2.55 J2.56 J2.57 J2.58 J2.61 J2.62 J2.63 J2.64 J2.67 J2.68 J2.69 J2.70 J3. J4.

## Polygon pours and split planes (outlines as drawn)
GND on Top GND "GND_L01_P007" (solid, remove dead copper, pour order 7): -1450,-1325 -1450,475 cw(c-1350,475) -1350,575 1350,575 cw(c1350,475) 1450,475 1450,-1325 cw(c1350,-1325) 1350,-1425 -1350,-1425 cw(c-1350,-1325)
+3V3 on Top GND "+3V3_L01_P002" (solid, remove dead copper, pour order 2): -428.86,-510 -438.86,-520 -538.86,-520 -548.86,-510 -548.86,-490 -538.86,-480 -438.86,-480 -428.86,-490
+5V on Top GND "+5V_L01_P006" (solid, remove dead copper, pour order 6): 530,-510 520,-520 420,-520 410,-510 410,-490 420,-480 520,-480 530,-490
GND on Bottom GND "GND_L04_P005" (solid, remove dead copper, pour order 5): -1450,-1325 -1450,475 cw(c-1350,475) -1350,575 1350,575 cw(c1350,475) 1450,475 1450,-1325 cw(c1350,-1325) 1350,-1425 -1350,-1425 cw(c-1350,-1325)
+5V on Sig/5V "+5V_L03_P012" (solid, remove dead copper, pour order 12): -1450,-1325 -1450,475 cw(c-1350,475) -1350,575 1350,575 cw(c1350,475) 1450,475 1450,-1325 cw(c1350,-1325) 1350,-1425 -1350,-1425 cw(c-1350,-1325)
+3V3 on Sig/3V3 "+3V3_L02_P013" (solid, remove dead copper, pour order 13): -1450,-1325 -1450,475 cw(c-1350,475) -1350,575 1350,575 cw(c1350,475) 1450,475 1450,-1325 cw(c1350,-1325) 1350,-1425 -1350,-1425 cw(c-1350,-1325)

## Keep-outs
Keep-Out Layer:
  lines w10: -1450,-1100 -1448.82,-1100 ; -1450,-1325 ccw(c-1350,-1325) -1350,-1425 1350,-1425 ccw(c1350,-1325) 1450,-1325 1450,475 ccw(c1350,475) 1350,575 -1350,575 ccw(c-1350,475) -1450,475 -1450,-1325

## Silkscreen, mask and mechanical layers (free items; w line width, h text height)
Top Overlay:
  lines w5: -1150,-240 -1135,-255 -1135,-225 -1150,-240 ; 1145,-255 1145,-225 1160,-240 1145,-255
  lines w10: -1300.58,-949.48 -1300.58,-899.48 ; -1300,-800 -1300,-750 ; 1299.42,-949.48 1299.42,-899.48 ; 1300,-800 1300,-750
  text "VOUT" at -1073.31,505.01 h40
  text "VOUT" at 926.69,505.01 h40
  text "GND" at -1353.32,80.01 h40
  text "GND" at 1246.68,80.01 h40
  text "+3V3" at -743.31,50.01 h40
  text "GND" at -553.32,50.01 h40
  text "+5V" at 436.68,50.01 h40
  text "GND" at 616.68,50.01 h40
  text "RAW" at 846.68,50.01 h40
  text "RAW" at -943.32,30.01 h40
  text "MINI297 4A FUSES" at -306.57,-309.99 h40
  text "OVD" at -1003.32,-369.99 h40
  text "OVD" at 906.68,-369.99 h40
  text "GND" at -1353.32,-869.99 h40
  text "GND" at 1246.68,-869.99 h40
Bottom Overlay:
  drawing of 23 lines, arcs and shapes, not listed
  text "YOLO MODE" at 173.28,155.01 h40
  text "(BYPASS PROTECTION)" at 359.88,80.01 h40
  text "YOVANY MOLINA / BLAKE SANDERS / SPRING 2024 / TGIS PDB V2" at 82.46,-842.57 h30
  text "M3" at 1006.67,-1293.33 h40
Mechanical 1:
  lines w10: -1075,-350 -1075,-240 ; -1075,-150 -975,-150 ; -1075,137.5 -1075,212.5 ; -1075,175 -891.14,150 -500,275 -225,275 ; -975,-75 -1075,-75 -1075,-240 ; -784.06,-240 -1075,-240 ; -500,350 -225,275 ; -475,-150 -225,-115.55 ; -208.07,475 -108.07,475 ; -91.14,275 -91.14,475 -225,475 -225,275 ; 100,275 100,475 233.86,475 233.86,275 ; 116.93,475 216.93,475 ; 233.86,-115.55 483.86,-150 ; 508.86,350 233.86,275 ; 792.91,-240 1083.86,-240 ; 983.86,-150 1083.86,-150 ; 983.86,-75 1083.86,-75 1083.86,-240 ; 1083.86,-350 1083.86,-240 ; 1083.86,137.5 1083.86,212.5 ; 1083.86,175 900,150 508.86,275 233.86,275 ; -225,275 233.86,275